# Altium PCB NSHID.PcbDoc
Units mil, origin at the board's own origin, x right, y up, seen from the top; angles counter-clockwise.
Board outline 3346.46 x 2204.72 mil, 2 copper layers (Top Layer, Bottom Layer); 51 components, 43 nets, 190 pads, 78 vias.
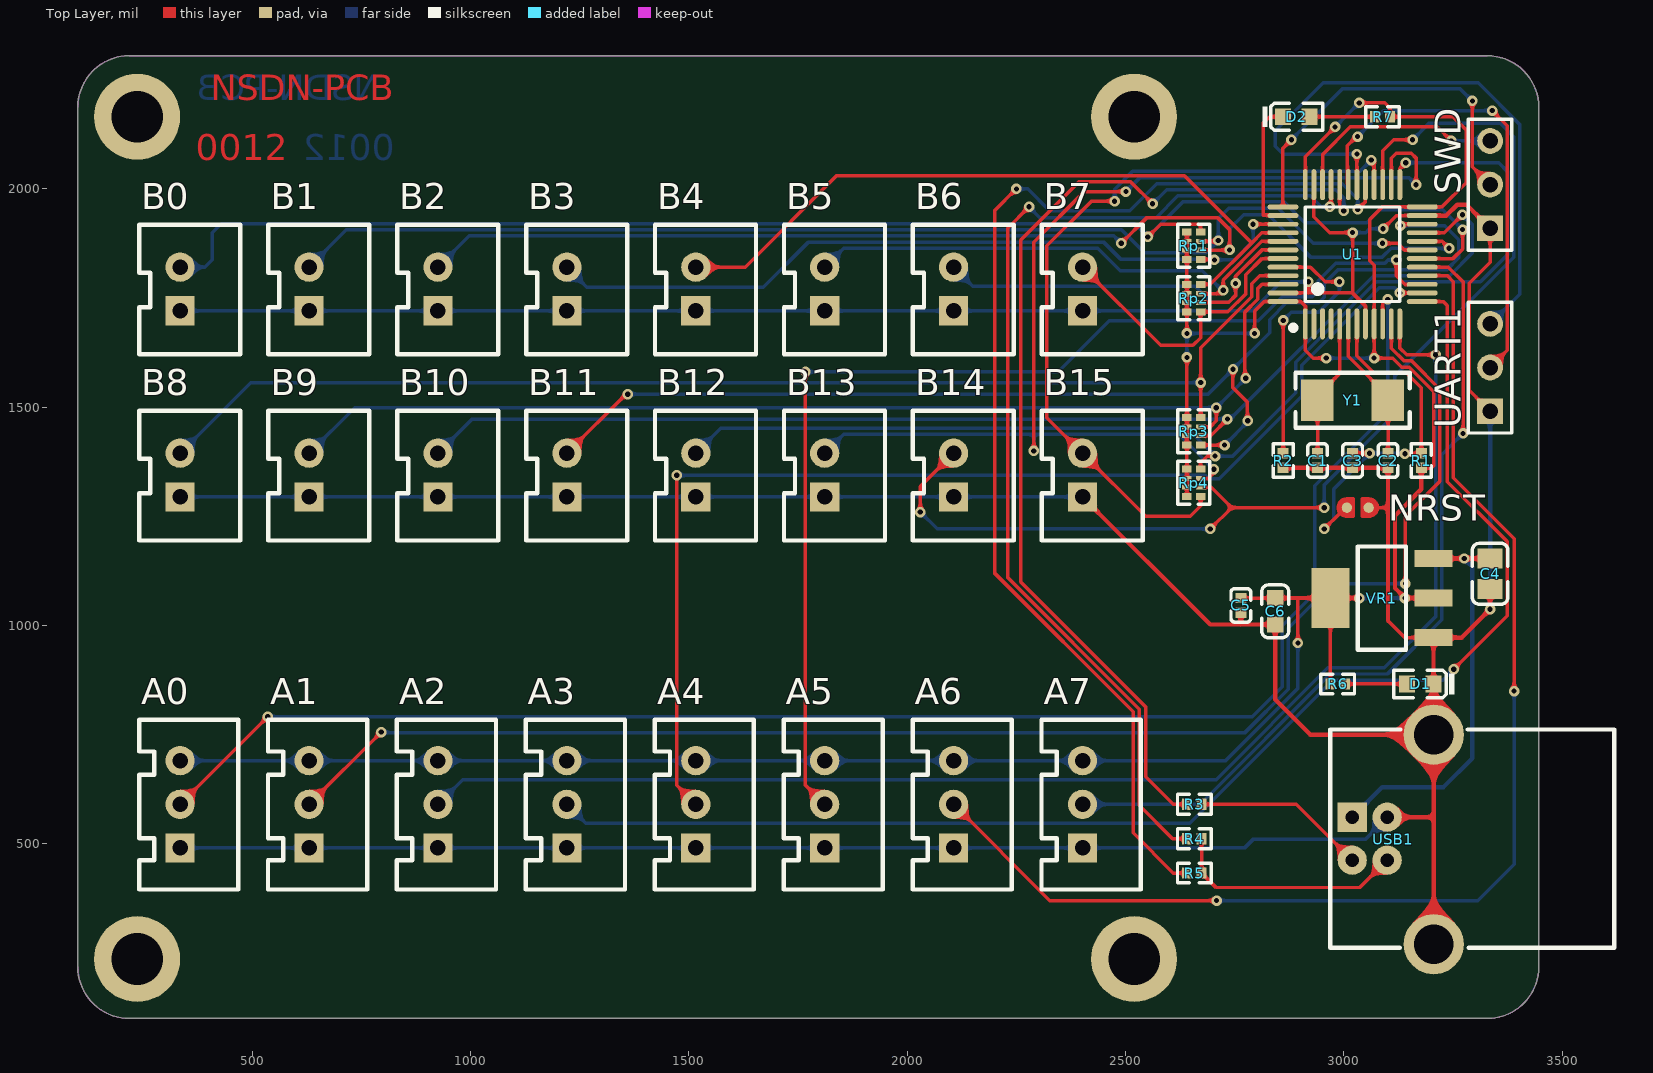
[diagram p0: Top Layer view]
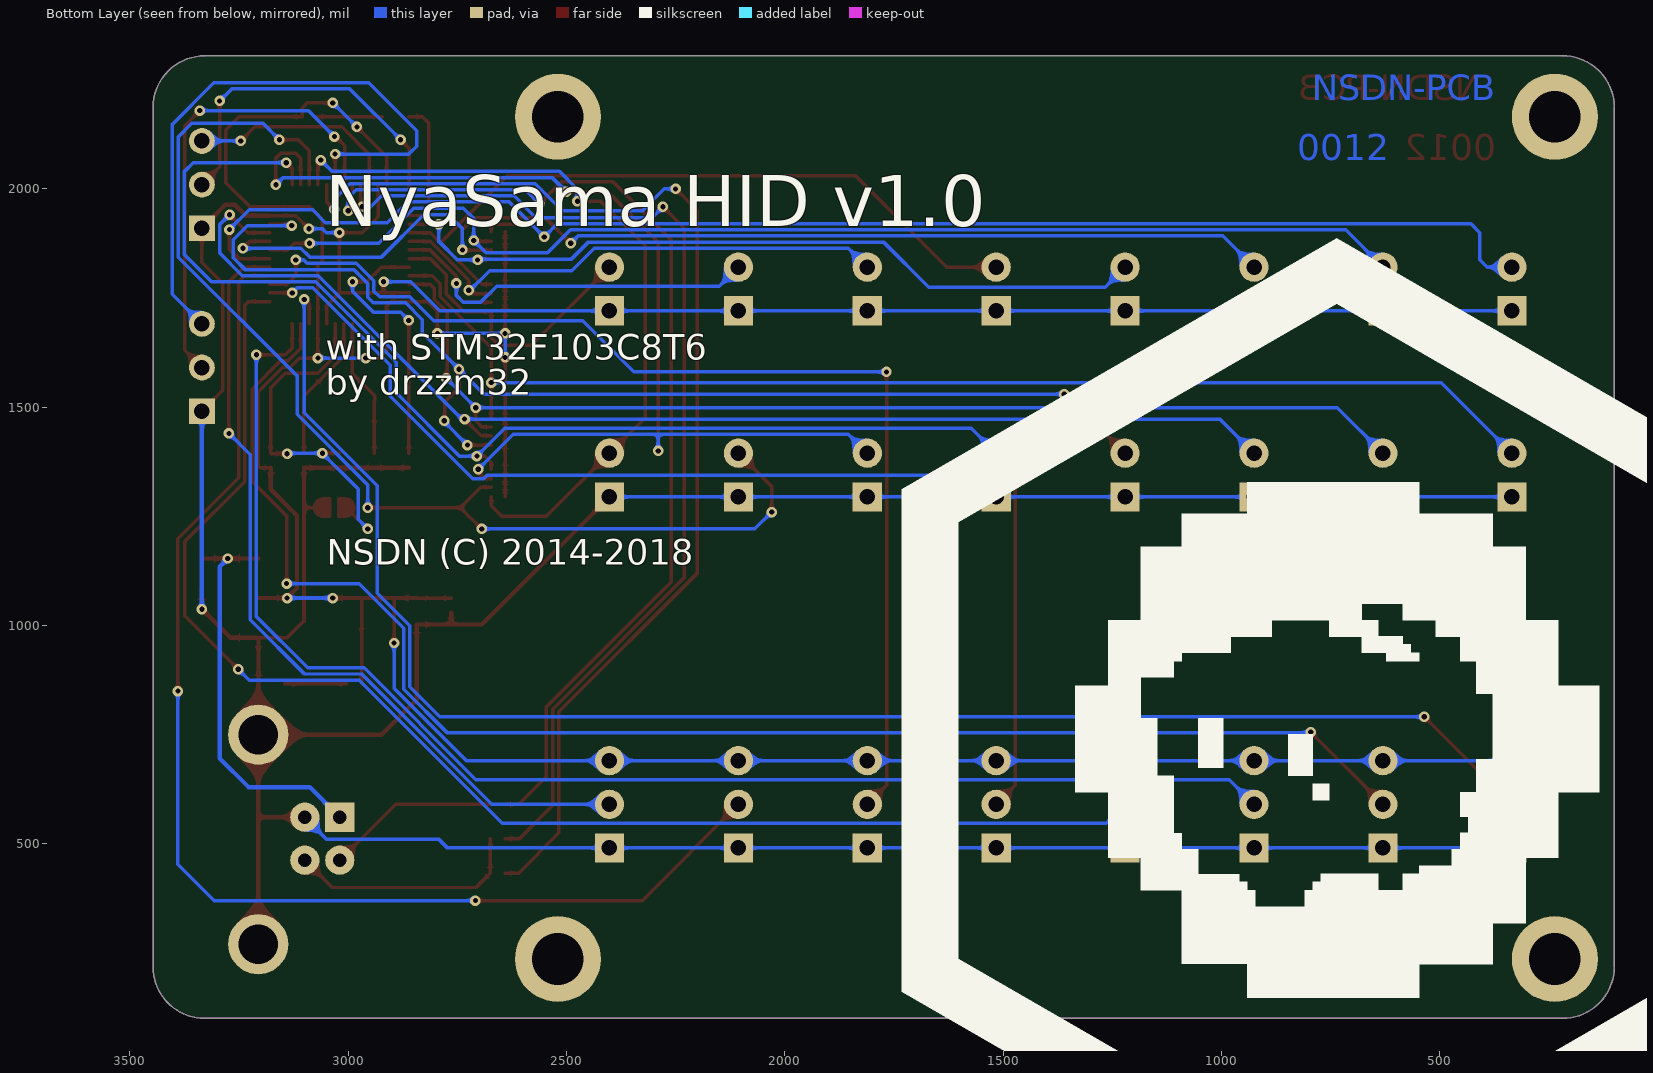
[diagram p1: Bottom Layer view, seen from below]
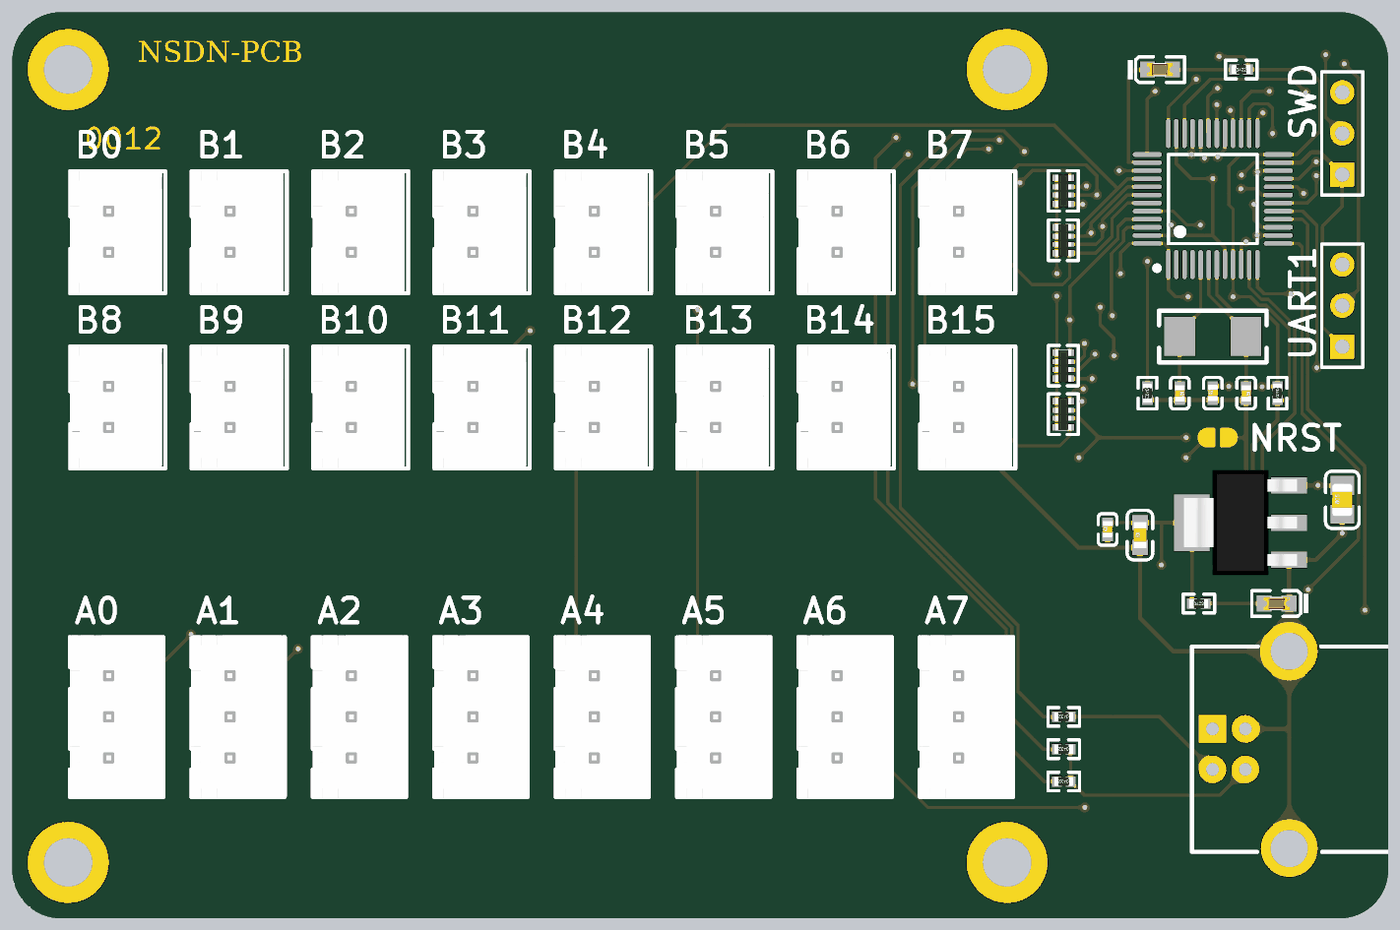
[diagram p2: 3D render of the assembled board from above, using the file's embedded part models]

## Layer stack, top to bottom
Top Solder: solder mask 0.4, Solder Resist, Dk 3.5
Top Layer: signal copper 1.4
Dielectric 1: dielectric 12.6, FR-4, Dk 4.8
Bottom Layer: signal copper 1.4
Bottom Solder: solder mask 0.4, Solder Resist, Dk 3.5

## Board outline
100.25,218.36 100.25,2186.86 cw(c218.36,2186.86) 218.36,2304.97 3328.6,2304.97 cw(c3328.6,2186.86) 3446.71,2186.86 3446.71,218.36 cw(c3328.6,218.36) 3328.6,100.25 218.36,100.25 cw(c218.36,218.36)

## Design rules (kind name [scope] priority, off if disabled: settings)
Clearance [All] p1: gap=6 ignorepadtopadclearanceinfootprint=FALSE
HoleSize [All] p1: absolutevalues=TRUE maxlimit=250 minlimit=11.81 maxpercent=80.000 minpercent=20.000
HoleToHoleClearance [All] p1: gap=18 allowstackedmicrovias=TRUE
MinimumSolderMaskSliver [All] p1: minsoldermaskwidth=6
PolygonConnect [All] p1: connectstyle=Relief reliefconductorwidth=10 reliefentries=4 polygonreliefangle="90 Angle" airgapwidth=10
RoutingTopology [All] p1: topology=Daisy_Balanced
RoutingVias [All] p1: holewidth=12 width=24 viastyle="Through Hole" minholewidth=11.81 minwidth=23.62 maxholewidth=250 maxwidth=261.81
SilkToSilkClearance [All] p1: silktosilkclearance=6
SilkToSolderMaskClearance [IsPad] p1: minsilkscreentomaskgap=6 clearancetoexposedcopper=TRUE
SolderMaskExpansion [All] p1: expansion=2
UnRoutedNet [All] p1: checkbadconnections=TRUE
Width [All] p1: maxlimit=20 minlimit=6 preferedwidth=8
23 further rules are at their usual default settings.

## Components (designator, comment, footprint, x,y, rotation, side; value= is the part's Value field where it differs from the comment)
A0 "HDR-1X3" XH2.54-LI-3P 334.65,590.55 r90 top (schematic designator JP17)
A1 "HDR-1X3" XH2.54-LI-3P 629.92,590.55 r90 top (schematic designator JP18)
A2 "HDR-1X3" XH2.54-LI-3P 925.2,590.55 r90 top (schematic designator JP19)
A3 "HDR-1X3" XH2.54-LI-3P 1220.47,590.55 r90 top (schematic designator JP20)
A4 "HDR-1X3" XH2.54-LI-3P 1515.75,590.55 r90 top (schematic designator JP21)
A5 "HDR-1X3" XH2.54-LI-3P 1811.02,590.55 r90 top (schematic designator JP22)
A6 "HDR-1X3" XH2.54-LI-3P 2106.3,590.55 r90 top (schematic designator JP23)
A7 "HDR-1X3" XH2.54-LI-3P 2401.57,590.55 r90 top (schematic designator JP24)
B0 "HDR-1X2" XH2.54-LI-2P 334.65,1770.87 r90 top (schematic designator JP1)
B1 "HDR-1X2" XH2.54-LI-2P 629.92,1770.87 r90 top (schematic designator JP2)
B2 "HDR-1X2" XH2.54-LI-2P 925.2,1770.87 r90 top (schematic designator JP3)
B3 "HDR-1X2" XH2.54-LI-2P 1220.47,1770.87 r90 top (schematic designator JP4)
B4 "HDR-1X2" XH2.54-LI-2P 1515.75,1770.87 r90 top (schematic designator JP5)
B5 "HDR-1X2" XH2.54-LI-2P 1811.02,1770.87 r90 top (schematic designator JP6)
B6 "HDR-1X2" XH2.54-LI-2P 2106.3,1770.87 r90 top (schematic designator JP7)
B7 "HDR-1X2" XH2.54-LI-2P 2401.57,1770.87 r90 top (schematic designator JP8)
B8 "HDR-1X2" XH2.54-LI-2P 334.65,1344.68 r90 top (schematic designator JP9)
B9 "HDR-1X2" XH2.54-LI-2P 629.92,1344.68 r90 top (schematic designator JP10)
B10 "HDR-1X2" XH2.54-LI-2P 925.2,1344.68 r90 top (schematic designator JP11)
B11 "HDR-1X2" XH2.54-LI-2P 1220.47,1344.68 r90 top (schematic designator JP12)
B12 "HDR-1X2" XH2.54-LI-2P 1515.75,1344.68 r90 top (schematic designator JP13)
B13 "HDR-1X2" XH2.54-LI-2P 1811.02,1344.68 r90 top (schematic designator JP14)
B14 "HDR-1X2" XH2.54-LI-2P 2106.3,1344.68 r90 top (schematic designator JP15)
B15 "HDR-1X2" XH2.54-LI-2P 2401.57,1344.68 r90 top (schematic designator JP16)
C1 "20pF (200) 5% 50V" 0402_C 2939.76,1377.95 r270 top
C2 "20pF (200) 5% 50V" 0402_C 3101.18,1377.95 r270 top
C3 "100nF (104) 10% 16V" 0402_C 3020.08,1377.95 r90 top
C4 "10uF (106) 10% 25V" 0805_C 3335.04,1118.5 r90 top
C5 "100nF (104) 10% 16V" 0402_C 2764.17,1046.26 r90 top
C6 "10uF (106) 10% 10V" 0603_C 2842.91,1032.68 r90 top
D1 "绿灯 0603" 0603_LED_S1 3175.2,866.14 r180 top
D2 "白灯 0603" 0603_LED_S1 2891.34,2165.35 r0 top
NRST "NRST" DEBUG_B 3032,1270 r0 top (schematic designator DE1)
NSDN "Comment" NSDN 736.28,-413.39 r180 bottom
R1 "100KΩ (1003) ±1%" 0402_R 3177.56,1377.95 r270 top
R2 "100KΩ (1003) ±1%" 0402_R 2861.02,1377.95 r270 top
R3 "22Ω (22R0) ±1%" 0402_R 2657.48,590.55 r180 top
R4 "22Ω (22R0) ±1%" 0402_R 2657.48,511.81 r180 top
R5 "1.5KΩ (1501) ±1%" 0402_R 2657.48,433.07 r180 top
R6 "1KΩ (1001) ±1%" 0402_R 2986.02,866.14 r0 top
R7 "1KΩ (1001) ±1%" 0402_R 3088.98,2165.35 r0 top
Rp1 "10KΩ (103) ±5%" 0402_Rx4 2656.5,1870.08 r270 top
Rp2 "10KΩ (103) ±5%" 0402_Rx4 2656.5,1750 r270 top
Rp3 "10KΩ (103) ±5%" 0402_Rx4 2656.5,1444.88 r270 top
Rp4 "10KΩ (103) ±5%" 0402_Rx4 2656.5,1326.77 r270 top
SWD "SWDIO" HDR1X3 3335.04,1909.84 r90 top (schematic designator P1)
U1 "STM32F103C8T6" LQFP-48_7x7x05P 3020.08,1850.39 r0 top
UART1 "USART1" HDR1X3 3335.04,1490.94 r90 top (schematic designator P2)
USB1 "USB" USB-B/S_A 3099.31,511.81 r90 top
VR1 "AMS1117-3.3" SOT-223 3087.4,1062.99 r0 top
Y1 "8MHz ±20ppm 20pF" SMD-5032_2P 3020.08,1515.75 r180 top

## Footprints (in the part's own frame and the unit in brackets; to place one, negate y for a bottom-side part, rotate by r counter-clockwise, add the part's x,y. Pads: shape width x height; smd on the part's side, far side on the other; paste and mask are expansions set on the pad)
0402_C [mm]
  rect 0.6x0.65 smd mask+0.051: 1(-0.425,0) 2(0.425,0)
  silkscreen extent -0.97,-0.58 0.98,0.58, body extent -0.48,-0.3 0.52,0.3, height 0.2
0402_R [mm]
  rect 0.6x0.65 smd mask+0.051: 1(-0.425,0) 2(0.425,0)
  silkscreen extent -0.97,-0.57 0.98,0.57, body extent -0.57,-0.27 0.58,0.28, height 0.41
0402_Rx4 [mm]
  rect 0.4x0.55 smd mask+0.051: 1(-0.8,-0.4) 4(0.8,-0.4) 5(0.8,0.4) 8(-0.8,0.4)
  rect 0.3x0.55 smd mask+0.051: 2(-0.25,-0.4) 3(0.25,-0.4) 6(0.25,0.4) 7(-0.25,0.4)
  silkscreen extent -1.25,-0.93 1.25,0.93, body extent -1,-0.5 1,0.5, height 0.45
0603_C [mm]
  rect 0.93x0.98 smd: 1(-0.77,0) 2(0.77,0)
  silkscreen extent -1.54,-0.79 1.54,0.79, body extent -0.8,-0.4 0.8,0.4, height 0.3
0603_LED_S1 [mm]
  rect 0.93x0.98 smd: A(0.77,0) K(-0.77,0)
  silkscreen extent -1.97,-0.79 1.53,0.79, body extent -0.8,-0.4 0.8,0.4, height 0.6
0805_C [mm]
  rect 1.16x1.47 smd: 1(-0.89,0) 2(0.89,0)
  silkscreen extent -1.77,-1.04 1.77,1.04, body extent -1,-0.62 1,0.63, height 0.77
DEBUG_B [mm] "调试断点焊盘"
  round 0.6 smd paste-0.6: 1(-0.635,0) 2(0.635,0)
  Top Layer region: 0.254,-0.508 0.762,-0.508 0.908,-0.479 1.031,-0.396 1.114,-0.273 1.143,-0.127 1.143,-0.127 1.143,0 1.104,0.194 0.994,0.359 0.829,0.469 0.635,0.508 0.635,0.508 0.254,0.508
  Top Layer region: -0.254,0.508 -0.762,0.508 -0.908,0.479 -1.031,0.396 -1.114,0.273 -1.143,0.127 -1.143,0.127 -1.143,0 -1.104,-0.194 -0.994,-0.359 -0.829,-0.469 -0.635,-0.508 -0.635,-0.508 -0.254,-0.508
  Top Layer lines w0.203: -1.033,-0.315 cw(c-0.635,0) -0.773,0.489 cw(c-0.635,0) -0.635,0.508 -0.254,0.508 -0.254,0 -0.254,-0.508 -0.635,-0.508 cw(c-0.635,0) -0.994,-0.359 cw(c-0.635,0) -1.033,-0.315 ; 0.254,-0.508 0.254,0 0.254,0.508 0.635,0.508 cw(c0.635,0) 1.143,0 cw(c0.635,0) 0.635,-0.508 0.254,-0.508
HDR1X3 [mm] "Connector; Header; 3 Position"
  rect 1.5x1.5 hole 0.9: 1(0,0)
  round 1.5 hole 0.9: 2(2.54,0) 3(5.08,0)
  silkscreen extent -1.27,-1.27 6.35,1.27
LQFP-48_7x7x05P [mm]
  oval 0.28x1.8 smd mask+0.051: 1(-2.75,-4.05) 2(-2.25,-4.05) 3(-1.75,-4.05) 4(-1.25,-4.05) 5(-0.75,-4.05) 6(-0.25,-4.05) 7(0.25,-4.05) 8(0.75,-4.05) 9(1.25,-4.05) 10(1.75,-4.05) 11(2.25,-4.05) 12(2.75,-4.05) 25(2.75,4.05) 26(2.25,4.05) 27(1.75,4.05) 28(1.25,4.05) 29(0.75,4.05) 30(0.25,4.05) 31(-0.25,4.05) 32(-0.75,4.05) 33(-1.25,4.05) 34(-1.75,4.05) 35(-2.25,4.05) 36(-2.75,4.05)
  oval 1.8x0.28 smd mask+0.051: 13(4.05,-2.75) 14(4.05,-2.25) 15(4.05,-1.75) 16(4.05,-1.25) 17(4.05,-0.75) 18(4.05,-0.25) 19(4.05,0.25) 20(4.05,0.75) 21(4.05,1.25) 22(4.05,1.75) 23(4.05,2.25) 24(4.05,2.75) 37(-4.05,2.75) 38(-4.05,2.25) 39(-4.05,1.75) 40(-4.05,1.25) 41(-4.05,0.75) 42(-4.05,0.25) 43(-4.05,-0.25) 44(-4.05,-0.75) 45(-4.05,-1.25) 46(-4.05,-1.75) 47(-4.05,-2.25) 48(-4.05,-2.75)
  silkscreen extent -3.6,-4.42 2.75,2.75
NSDN [mil]
  silkscreen extent -996,0 996,2300
SMD-5032_2P [mm]
  rect 1.9x2.4 smd: 1(-2.05,0) 2(2.05,0)
  silkscreen extent -3.32,-1.6 3.32,1.6
SOT-223 [mm]
  rect 2.2x1 smd: 1(3,-2.3) 2(3,0) 3(3,2.3)
  rect 2.2x3.5 smd: 2(-3,0)
  silkscreen extent -1.4,-3 1.4,3, body extent -3.49,-3.24 3.49,3.24, height 1.64
USB-B/S_A [mm] "b型USB 母座 16.3*13.7*11mm"
  rect 1.7x1.7 hole 0.8: 1(1.25,2.032)
  round 1.7 hole 0.8: 2(-1.25,2.032) 3(-1.25,0) 4(1.25,0)
  round 3.5 hole 2.3: 4(-6.141,-2.71) 4(6.051,-2.71)
  silkscreen extent -6.35,-13.21 6.35,3.3, body extent -6.86,-13.16 6.86,3.14, height 11.45
XH2.54-LI-2P [mm] "接插件，2P"
  rect 1.7x1.7 hole 0.9: 1(-1.27,0)
  round 1.7 hole 0.9: 2(1.27,0)
  silkscreen extent -3.81,-3.51 3.74,2.37, body extent -3.77,-3.3 3.77,2.4, height 7.05
XH2.54-LI-3P [mm] "接插件，3P"
  rect 1.7x1.7 hole 0.9: 1(-2.54,0)
  round 1.7 hole 0.9: 2(0,0) 3(2.54,0)
  silkscreen extent -4.95,-3.38 4.93,2.39, body extent -5.04,-3.3 5.04,2.4, height 7.03

## Part data
A0 A1 A2 A3 A4 A5 A6 A7: library part "Header 3", "3P接插件"
B0 B1 B2 B3 B4 B5 B6 B7 B8 B9 B10 B11 B12 B13 B14 B15: library part "Header 2", "2P接插件"
C1 C2: library part "0402 20pF (200) 5% 50V", "贴片电容", Package=0402, SuppliersPartNumber=C1554, ComponentLink1Description=供?, ComponentLink1URL=http://www.szlcsc.com/product/details_1906.html, Supplier=LC
C3 C5: library part "0402 100nF (104) 10% 16V", "贴片电容", Package=0402, SuppliersPartNumber=C1525, ComponentLink1Description=供?, ComponentLink1URL=http://www.szlcsc.com/product/details_1877.html, Supplier=LC
C4: library part "0805 10uF (106) 10% 25V", "贴片电容", Package=0805, SuppliersPartNumber=C15850, ComponentLink1Description=供?, ComponentLink1URL=http://www.szlcsc.com/product/details_16532.html, Supplier=LC
C6: library part "0603 10uF (106) 10% 10V", "贴片电容", Package=0603, SuppliersPartNumber=C19702, ComponentLink1Description=供?, ComponentLink1URL=http://www.szlcsc.com/product/details_20411.html, Supplier=LC
D1: library part "0603 绿灯", "发光二极管", Package=0603, SuppliersPartNumber=C72043, ComponentLink1Description=供?, ComponentLink1URL=http://www.szlcsc.com/product/details_73152.html, Supplier=LC
D2: library part "0603 白灯", "发光二极管", Package=0603, SuppliersPartNumber=C2290, ComponentLink1Description=供?, ComponentLink1URL=http://www.szlcsc.com/product/details_2663.html, Supplier=LC
NRST: library part DEBUG, "调试断点焊盘"
R1 R2: library part "0402 100KΩ (1003) 1%", "贴片电阻", Package=0402, SuppliersPartNumber=C25741, ComponentLink1Description=供?, ComponentLink1URL=http://www.szlcsc.com/product/details_26484.html, Supplier=LC
R3 R4: library part "0402 22Ω (22R0) 1%", "贴片电阻", Package=0402, SuppliersPartNumber=C25092, ComponentLink1Description=供?, ComponentLink1URL=http://www.szlcsc.com/product/details_25835.html, Supplier=LC
R5: library part "0402 1.5KΩ (1501) 1%", "贴片电阻", Package=0402, SuppliersPartNumber=C25867, ComponentLink1Description=供?, ComponentLink1URL=http://www.szlcsc.com/product/details_26610.html, Supplier=LC
R6 R7: library part "0402 1KΩ (1001) 1%", "贴片电阻", Package=0402, SuppliersPartNumber=C11702, ComponentLink1Description=供?, ComponentLink1URL=http://www.szlcsc.com/product/details_12256.html, Supplier=LC
Rp1 Rp2 Rp3 Rp4: library part "0402*4 10KΩ (103) 5%", "贴片排阻", Package=0402*4, SuppliersPartNumber=C25725, ComponentLink1Description=供?, ComponentLink1URL=http://www.szlcsc.com/product/details_26468.html, Supplier=LC
SWD UART1: library part "Header 3", "Header, 3-Pin", LatestRevisionDate=17-Jul-2002, LatestRevisionNote="Re-released for DXP Platform.", Publisher="Altium Limited"
U1: "ARM", Package=LQFP-48_7x7x05P, SuppliersPartNumber=C8734, ComponentLink1Description=供?, ComponentLink1URL=http://www.szlcsc.com/product/details_9243.html, Supplier=LC
USB1: library part USB-B/S, "USB-B型母接口", BOM名称=USB
VR1: library part "SOT-223 AMS1117-3.3", "低压差线性稳压(LDO)", Package=SOT-223, SuppliersPartNumber=C6186, ComponentLink1Description=供?, ComponentLink1URL=http://www.szlcsc.com/product/details_6652.html, Supplier=LC
Y1: library part "SMD-5032_2P 8MHz 20ppm 20pF", "贴片晶振", Package=SMD-5032_2P, SuppliersPartNumber=C115962, ComponentLink1Description=供?, ComponentLink1URL=http://www.szlcsc.com/product/details_117214.html, Supplier=LC

## Free pads (board coordinates)
  round 196.85 hole 118.11: ""(236.22,236.22) ""(236.22,2165.35) ""(2519.69,236.22) ""(2519.69,2165.35)

## Via types
v1: diameter 24, hole 12, Top Layer to Bottom Layer, tented both sides, 78 vias

## Nets (pads, with @x,y where several pads share a name; then routed paths per layer and width w, separated by ;. In a path a pad name is that pad's centre, name@x,y a point inside that pad or via, vN(x,y) a via of type N, cw(c..) or ccw(c..) an arc to the next point about the centre after c; other vN are vias at no path point)
3V3: A0.3 A1.3 A2.3 A3.3 A4.3 A5.3 A6.3 A7.3 C5.2 C6.2 R1.2 R6.1 R7.2 Rp1.1 Rp1.2 Rp1.3 Rp1.4 Rp2.1 Rp2.2 Rp2.3 Rp2.4 Rp3.1 Rp3.2 Rp3.3 Rp3.4 Rp4.1 Rp4.2 Rp4.3 Rp4.4 U1.1 U1.9 U1.24 U1.36 U1.48 VR1.2 | length 6603.6
  Top Layer w8: Rp4.4 Rp4.3 Rp4.2 Rp4.1 Rp3.4 Rp3.3 Rp3.2 Rp3.1 v1(2640.75,1614.17) ; v1(2640.75,1669) Rp2.4 Rp2.3 Rp2.2 Rp2.1 Rp1.4 Rp1.3 Rp1.2 Rp1.1 ; C5.2 C6.2 ; v1(2795.57,1669) 2795.57,1720.31 2817.38,1742.13 U1.48 2901.58,1742.13 2911.81,1731.89 U1.1 2911.81,1630.69 2930,1612.5 2930.1,1612.6 v1(2959.89,1612.6) ; v1(2895,960) 2895,1062.99 ; U1.36@2911.81,2009 U1.36 2911.81,2073.81 v1(2980,2142) ; R6.1 VR1.2@2969.29,1062.99 ; v1(3035.43,2197) 3093.79,2197 3105.71,2185.08 R7.2 3250,2165.35 3280.5,2134.85 3280.5,2014.5 3224.66,1958.66 U1.24 3087.72,1958.66 3059.05,1929.99 3059.05,1835.88 3069.29,1825.64 U1.9 v1(3069.29,1612.6) 3069.19,1612.5 3111.87,1612.5 3132.37,1592 3149.63,1592 3206,1535.63 3206,1366.32 3200.9,1361.22 R1.2
  Top Layer w10: C6.2 2895,1062.99 2969.29,1062.99 v1(3035.43,1062.99) ; R1.2 3177.56,1312.06 3117.18,1251.68 3117.18,1085.81 v1(3140,1062.99) VR1.2@3205.51,1062.99
  Bottom Layer w8: A0.3 A1.3 A2.3 A3.3 A4.3 A5.3 A6.3 A7.3 2729.04,690.55 2895,856.51 v1(2895,960) ; v1(2640.75,1614.17) v1(2640.75,1669) v1(2795.57,1669) ; v1(2959.89,1612.6) v1(3069.29,1612.6) ; v1(2980,2142) 3035,2197 v1(3035.43,2197)
  Bottom Layer w10: v1(3035.43,1062.99) v1(3140,1062.99)
A0: A0.2 U1.10 | length 3685.6
  Top Layer w8: A0.2 v1(535.09,791) ; U1.10 3088.98,1738.5 3097.26,1746.79 v1(3100.79,1746.79)
  Bottom Layer w8: v1(535.09,791) 2789.89,791 2859,860.11 2859,999.91 2933,1073.91 2933,1319.8 3100.79,1487.59 v1(3100.79,1746.79)
A1: A1.2 U1.11 | length 3486.6
  Top Layer w8: A1.2 v1(795.28,755.91) ; U1.11 3108.66,1635.51 3138.17,1606 3155.43,1606 3220,1541.43 3220,1330 3141,1251 v1(3141,1096)
  Bottom Layer w8: v1@795.28,755 2773.69,755 2873,854.31 2873,994.11 2974.89,1096 v1(3141,1096)
A2: A2.2 U1.12 | length 3206.1
  Top Layer w8: U1.12 3128.35,1635.63 3143.97,1620 v1(3210,1620)
  Bottom Layer w8: A2.2 981.64,647 2707.4,647 2963.4,903 3093,903 3210,1020 v1(3210,1620)
A3: A3.2 U1.13 | length 3197.3
  Top Layer w8: U1.13 3227.87,1742.13 3237,1733 3237,1329.4 3374,1192.4 3374,1022 v1(3252,900)
  Bottom Layer w8: A3.2 1264.02,547 2647,547 2975,875 3227,875 v1(3252,900)
A4: A4.2 U1.14 | length 2710
  Top Layer w8: v1(1472,1344) 1472,634.3 A4.2 ; v1(3128.19,1761.81) U1.14
  Bottom Layer w8: v1(1472,1344) 2682,1344 2690,1336 2714.98,1336 2903.78,1524.8 2903.78,1595.78 3081.4,1773.4 3116.6,1773.4 v1(3128.19,1761.81)
A5: A5.2 U1.15 | length 2585.7
  Top Layer w8: v1(1767,1581) 1767,634.58 A5.2 ; 3119.97,1801.15 3139.62,1781.5 U1.15 ; 3120,1801.18 v1(3120,1837.5)
  Bottom Layer w8: v1(1767,1581) 2345.5,1581 2462.5,1698 2804,1698 2859,1753 2928,1753 2941,1766 2941,1789.31 2981.69,1830 3094.19,1830 3101.69,1837.5 v1(3120,1837.5)
A6: A6.2 U1.16 | length 2878.7
  Top Layer w8: A6.2 2326.77,370.08 v1(2708.66,370.08) ; U1.16 3237.5,1801.18 3251,1787.68 3251,1338.18 3390,1199.18 v1(3390,850)
  Bottom Layer w8: v1(2708.66,370.08) 3307.09,370.08 3390,452.99 v1(3390,850)
A7: A7.2 U1.17 | length 1899.2
  Top Layer w8: U1.17 3239.13,1820.87 3273,1787 v1(3273,1440)
  Bottom Layer w8: A7.2 2670.75,590.55 2969.2,889 3100,889 3224,1013 3224,1391 v1(3273,1440)
D0: B0.2 Rp1.8 U1.18 | length 3405.1
  Top Layer w8: v1(2551.1,1890) 2580.55,1919.45 2654.37,1919.45 2666.39,1919.45 2672.24,1913.59 Rp1.8 ; U1.18 3250.05,1840.55 3272,1862.5 v1(3272,1907)
  Bottom Layer w8: B0.2 391.37,1820.87 408,1837.5 408,1900 428.33,1920.33 2520.77,1920.33 v1(2551.1,1890) 2631.2,1970.1 2863.55,1970.1 2910.83,1922.82 3052.11,1922.82 3081.29,1952 3227,1952 v1(3272,1907)
D1: B1.2 Rp1.7 U1.19 | length 2759.8
  Top Layer w8: Rp1.7 2710.63,1879.92 v1(2712.59,1881.89) ; v1(3088.39,1875.49) 3123.5,1875.49 3138.75,1860.24 U1.19
  Bottom Layer w8: B1.2 715.39,1906.33 2490.69,1906.33 2543.52,1853.5 2684.21,1853.5 v1(2712.59,1881.89) 2712.59,1932.28 2736.41,1956.1 2849.55,1956.1 2930.16,1875.49 v1(3088.39,1875.49)
D2: B2.2 Rp1.6 U1.20 | length 2679.4
  Top Layer w8: v1(2490,1875.49) 2547.96,1933.45 2711.74,1933.45 2738.19,1907 v1(2738.19,1860.24) 2737.84,1859.89 Rp1.6@2672.59,1859.89 ; Rp1.6 Rp1.6@2672.59,1859.89 ; Rp1.6@2672.98,1859.5 Rp1.6@2672.59,1859.89 ; U1.20 3225,1879.92 v1(3241,1863.92)
  Bottom Layer w8: B2.2 996.66,1892.33 2473.15,1892.33 v1(2490,1875.49) ; v1(2738.19,1860.24) 2738.19,1908.48 2771,1941.29 2826.5,1941.29 2923.79,1844 3088.39,1844 3108.31,1863.92 v1(3241,1863.92)
D3: B3.2 Rp1.5 U1.39 | length 1806.2
  Top Layer w8: Rp1.5 v1@2702.42,1838.58 ; v1@2701.5,1839.5 v1@2702.42,1838.58 ; v1(2703.5,1837.5) v1@2702.42,1838.58 ; v1(2792,1919.29) U1.39
  Bottom Layer w8: B3.2 1266.34,1775 1670.67,1775 1774,1878.33 2449.67,1878.33 2488.5,1839.5 v1@2701.5,1839.5 ; v1(2703.5,1837.5) 2749.97,1837.5 2792,1879.53 v1(2792,1919.29)
D4: B4.2 Rp2.8 U1.40 | length 1661.4
  Top Layer w8: B4.2 1628.87,1820.87 1838,2030 2634.99,2030 2787.69,1877.3 2790,1877.3 ; Rp2.8 2694.2,1781.5 2790,1877.3 ; U1.40 2812.31,1899.61 2790,1877.3
D5: B5.2 Rp2.7 U1.41 | length 1226.3
  Top Layer w8: Rp2.7 2715.94,1759.84 v1(2723.81,1767.72) 2723.81,1791.31 2812.42,1879.92 U1.41
  Bottom Layer w8: B5.2 1854.49,1864.33 2436.67,1864.33 2488,1813 2676.03,1813 2723.81,1765.21 v1(2723.81,1767.72)
D6: B6.2 Rp2.6 U1.42 | length 976.9
  Top Layer w8: Rp2.6 2736.22,1740.16 2751.97,1755.91 v1(2751.97,1783.46) 2751.97,1799.67 2812.54,1860.24 U1.42
  Bottom Layer w8: B6.2 2150.17,1777 2660,1777 2696.84,1740.16 2736.22,1740.16 2751.97,1755.91 v1(2751.97,1783.46)
D7: B7.2 Rp2.5 U1.43 | length 676
  Top Layer w8: B7.2 2580.71,1641.73 2654.52,1641.73 2672,1659.21 2672,1718.5 Rp2.5 2734.37,1718.5 2775.14,1759.28 2775.14,1803.04 2812.65,1840.55 U1.43
D8: B8.2 Rp3.8 U1.45 | length 2838.8
  Top Layer w8: Rp3.8 v1(2672.24,1556.48) 2672.24,1636.58 2789.14,1753.48 2789.14,1783.24 2807.09,1801.18 U1.45
  Bottom Layer w8: B8.2 496.44,1556.48 v1(2672.24,1556.48)
D9: B9.2 Rp3.7 U1.46 | length 2568.5
  Top Layer w8: Rp3.7 2693.75,1454.72 2708,1468.98 v1(2708,1499) ; v1(2775.59,1566.59) 2773.57,1568.61 2773.57,1718.11 2803.14,1747.68 2803.14,1772.05 2812.59,1781.5 U1.46
  Bottom Layer w8: B9.2 734.24,1499 v1(2708,1499) v1(2775.59,1566.59)
D10: B10.2 Rp3.6 U1.21 | length 2841.9
  Top Layer w8: Rp3.6 2695.54,1435.04 v1(2733.5,1473) ; U1.21 3230.31,1899.61 v1(3271.65,1940.94)
  Bottom Layer w8: B10.2 1003.51,1473 v1(2733.5,1473) 2740.24,1473 3068.64,1801.4 3242.2,1801.4 3294,1853.2 3294,1918.59 v1(3271.65,1940.94)
D11: B11.2 Rp3.5 U1.22 | length 2765
  Top Layer w8: B11.2 1355.79,1530 v1(1360,1530) ; Rp3.5 v1(2726.89,1413.39) ; v1(2746.14,1587.14) 2746.14,1544.86 2779,1512 v1@2779,1473 ; v1(3129,1916) 3132.29,1919.29 U1.22
  Bottom Layer w8: v1(1360,1530) 2689,1530 v1(2746.14,1587.14) 2830,1671 2830,1700.51 2868.49,1739 2942.5,1739 2955,1751.5 2955,1783.51 2986.89,1815.4 3236.4,1815.4 3263,1842 3263,1884 3231,1916 v1(3129,1916) ; v1(2726.89,1413.39) 2780,1466.5 v1(2780,1468.98)
D12: B12.2 Rp4.8 U1.25 | length 2683.5
  Top Layer w8: Rp4.8 2672,1358.51 2672,1372.64 2687.5,1388.14 v1(2705.14,1388.14) ; U1.25 3128.35,2046.61 v1(3141.73,2060)
  Bottom Layer w8: B12.2 1573.21,1452.15 2641.14,1452.15 v1(2705.14,1388.14) 2745.1,1388.14 2889.78,1532.82 2889.78,1602.75 3074.44,1787.4 3312.95,1787.4 3375,1849.45 3375,2040 3355,2060 v1(3141.73,2060)
D13: B13.2 Rp4.7 U1.26 | length 2632.8
  Top Layer w8: v1(2290,1400) 2290,1878 2406,1994 v1(2501,1994) ; Rp4.7 2688.61,1336.61 2702,1350 v1(2702,1358) ; U1.26 3108.66,2070.4 3120.26,2082 3154.22,2082 3165.35,2070.87 v1(3165.35,2009.84)
  Bottom Layer w8: B13.2 1854.49,1438.15 2290,1438.15 ; v1(2290,1400) 2290,1438.15 ; v1(2501,1994) 2533.1,2026.1 3149.09,2026.1 v1(3165.35,2009.84) ; v1(2702,1358) 2621.85,1438.15 2290,1438.15
D14: B14.2 Rp4.6 U1.27 | length 2662.8
  Top Layer w8: v1(2030,1260) 2030,1318.38 B14.2 ; Rp4.6 2696,1316.93 2742.93,1270 ; v1(2694.2,1221.27) 2742.93,1270 ; v1(2955,1270) 2742.93,1270 ; U1.27 3088.98,2087.5 3113.98,2112.5 v1(3157.5,2112.5)
  Bottom Layer w8: v1(2030,1260) 2068.73,1221.27 v1(2694.2,1221.27) ; v1(2955,1270) 2955,1322 3117,1484 3117,1571.65 3389,1843.65 3389,2119 3358,2150 3195,2150 v1(3157.5,2112.5)
D15: B15.2 Rp4.5 U1.28 | length 1769.8
  Top Layer w8: v1(2475,1972) 2422,1972 2320,1870 2320,1476.26 B15.2 2546.26,1250 2648,1250 2672,1274 2672,1295.28 Rp4.5 ; v1(3063,2066) 3069.29,2059.71 U1.28
  Bottom Layer w8: v1(2475,1972) 2475,1999.11 2515.99,2040.1 3037.1,2040.1 v1(3063,2066)
GND: A0.1 A1.1 A2.1 A3.1 A4.1 A5.1 A6.1 A7.1 B0.1 B1.1 B2.1 B3.1 B4.1 B5.1 B6.1 B7.1 B8.1 B9.1 B10.1 B11.1 B12.1 B13.1 B14.1 B15.1 C1.2 C2.2 C3.1 C4.1 C5.1 C6.1 D1.K NRST.2 R2.2 SWD.1 U1.8 U1.23 U1.35 U1.47 UART1.1 USB1.4 VR1.1 | length 12273.7
  Top Layer w8: U1.47 2919,1761.81 ; v1(2919,1787.4) 2919,1761.81 ; U1.35 2931.5,1936.11 2967.61,1900 v1(3020,1900) 3020,1763.91 3018.79,1762.7 3049.61,1731.89 U1.8 ; 3018.79,1761.81 2919,1761.81 ; NRST.2 3077,1270 3101.18,1270 ; v1(3090,1908.82) 3120.16,1938.98 U1.23 ; USB1.4@3090.55,561.02 USB1.4@3099.31,561.02 ; 3100.59,1294.68 3101.18,1295.28 ; 3101.18,1011.26 3140,972.44 VR1.1 ; UART1.1 3287,1538.98 3287,1784.4 3335.04,1832.44 SWD.1
  Top Layer w10: B15.1 2693.9,1002.36 2764.17,1002.36 ; C5.1 2764.17,1002.36 ; R2.2 C1.2 C3.1 C2.2 3101.18,1295.28 3101.18,1270 3101.18,1011.26 ; USB1.4@3099.31,561.02 3206,561.02 ; U1.23 3234.69,1938.98 3259.66,1963.94 3281.17,1963.94 3294.65,1950.47 3294.65,1950.23 SWD.1 ; USB1.4@3197.24,270.02 3206,278.78 3206,561.02 ; C4.1 v1(3335.04,1037.48) 3270,972.44 VR1.1 D1.K 3206,865.65 USB1.4@3206,750.02 ; 2764.17,1002.36 C6.1 2842.91,830.47 2923.36,750.02 USB1.4@3206,750.02 ; 3206,561.02 USB1.4@3206,750.02
  Bottom Layer w8: A0.1 A1.1 A2.1 A3.1 A4.1 A5.1 A6.1 A7.1 2772.55,490.55 2793,511 3050.36,511 3099.31,559.95 USB1.4@3099.31,561.02 ; B8.1 B9.1 B10.1 B11.1 B12.1 B13.1 B14.1 B15.1 ; B0.1 B1.1 B2.1 B3.1 B4.1 B5.1 B6.1 B7.1 2789.87,1720.87 2856.4,1787.4 v1(2919,1787.4) ; v1@3018.79,1902.54 3021.34,1900 3050,1900 3058.82,1908.82 v1(3090,1908.82) ; USB1.4@3090.55,559.95 USB1.4@3090.55,561.02
  Bottom Layer w10: v1(3335.04,1037.48) UART1.1
NetC1_1: C1.1 U1.5 Y1.2 | length 317.6
  Top Layer w8: C1.1 2939.76,1515.35 Y1.2 2939.37,1525.96 2990.55,1577.14 U1.5
NetC2_1: C2.1 U1.6 Y1.1 | length 333.9
  Top Layer w8: U1.6 3010.24,1616.55 3100.79,1526 Y1.1 3101.18,1515.35 C2.1
NetC3_2: C3.2 NRST.1 R1.1 U1.7 | length 860.6
  Top Layer w8: v1(2955,1221.27) 2991.32,1257.59 3003.73,1270 NRST.1 ; 2992.86,1280.54 3001.56,1289.25 ; C3.2 v1(3059.06,1394.68) ; U1.7 3029.92,1618.01 3069.93,1578 3143.83,1578 3177.56,1544.27 R1.1 3176.58,1393.7 v1(3140,1393.7)
  Bottom Layer w8: v1(2955,1221.27) 2977,1243.27 2977,1312.63 v1(3059.06,1394.68) 3140,1394.68 v1(3140,1393.7)
NetD1_A: D1.A R6.2 | length 142.1
  Top Layer w8: R6.2 D1.A
NetD2_A: D2.A R7.1 | length 150.6
  Top Layer w8: D2.A R7.1
NetR2_1: R2.1 U1.44 | length 625.7
  Top Layer w8: U1.44 2923.63,1820.87 2957.1,1787.4 v1(2990,1787.4) ; R2.1 v1(2861.02,1698.76)
  Bottom Layer w8: v1(2861.02,1698.76) 2880.01,1717.75 2942.07,1717.75 2990,1765.67 v1(2990,1787.4)
NetR3_1: R3.1 USB1.2 | length 394.5
  Top Layer w8: R3.1 2891.35,590.55 3010.55,471.35 USB1.2@3010.55,462.6
NetR4_1: R4.1 R5.1 USB1.3 | length 539.8
  Top Layer w8: R4.1 R5.1 2707.28,400 3036.71,400 3090.55,453.84 USB1.3@3090.55,462.6
SWD_CLK: SWD.2 U1.37 | length 844.9
  Top Layer w8: U1.37 2860.63,2093.13 v1(2880,2112.5) ; v1(3294.5,2201.5) 3294.5,2050.38 SWD.2
  Bottom Layer w8: v1(2880,2112.5) 2879.76,2112.5 2996.26,2229 3267,2229 v1(3294.5,2201.5)
SWD_DIO: SWD.3 U1.34 | length 492
  Top Layer w8: U1.34 2951.18,2078.27 3014.91,2142 3213.84,2142 v1(3246,2109.84)
  Bottom Layer w8: v1(3246,2109.84) SWD.3
SYS_LED: D2.K U1.38 | length 308
  Top Layer w8: U1.38 2815,1939.98 2815,2150 2830.35,2165.35 D2.K
U5V: C4.2 USB1.1 VR1.3 | length 934.7
  Top Layer w10: VR1.3 v1(3275.59,1153.54) C4.2
  Bottom Layer w10: USB1.1@3010.55,561.02 USB1.1 3088.21,629.92 3228.35,629.92 3294.5,696.07 3294.5,1134.63 v1(3275.59,1153.54)
USART1_RX: U1.31 UART1.2 | length 1074.7
  Top Layer w8: U1.31 3008,2012.08 3008,2099.11 3028.89,2120 v1(3031.5,2120) ; UART1.2 3335.04,1591.16 3374.57,1630.69 3374.57,2144.93 v1(3340,2179.5)
  Bottom Layer w8: v1(3031.5,2120) 3091,2179.5 v1(3340,2179.5)
USART1_TX: U1.30 UART1.3 | length 1429.6
  Top Layer w8: U1.30 3029.92,2079.92 v1(3030,2080)
  Bottom Layer w8: v1(3030,2080) 2861.02,2080 2842.91,2098.11 2842.91,2132.91 2953,2243 3307.61,2243 3403,2147.61 3403,1758.9 UART1.3
USB_DM: R3.2 U1.32 | length 2401.2
  Top Layer w8: v1(2562,1966) 2512,2016 2393,2016 2260,1883 2260,1099.8 2546.26,813.54 2546.26,653.26 2608.97,590.55 R3.2 ; U1.32 2990.55,1959.45 v1(3000,1950) v1@2997.94,1950
  Bottom Layer w8: v1(2562,1966) 2594.1,1998.1 2981.9,1998.1 3000,1980 v1(3000,1950)
USB_DP: R4.2 U1.33 | length 2439.2
  Top Layer w8: v1(2279,1959) 2230,1910 2230,1110 2531.38,808.62 2531.38,588.14 2607.71,511.81 R4.2 ; v1(2968,1959) 2970.87,1961.87 U1.33
  Bottom Layer w8: v1(2279,1959) 2303.67,1934.33 2569.99,1934.33 2619.76,1984.1 2922.85,1984.1 2947.95,1959 v1(2968,1959)
USB_PU: R5.2 U1.29 | length 2719.1
  Top Layer w8: v1(2250,2000) 2200,1950 2200,1120.2 2517.38,802.82 2517.38,525.21 2609.52,433.07 R5.2 ; v1(3032,1953) 3049.61,1970.61 U1.29
  Bottom Layer w8: v1(2250,2000) 2276,2000 2326,1950 2509.42,1950 2571.52,2012.1 2996.01,2012.1 3032,1976.11 v1(3032,1953)
pads on no net: U1.2 U1.3 U1.4

## Keep-outs
Keep-Out Layer:
  the board outline again, w1

## Other copper
Top Layer:
  text "NSDN-PCB" at 404.98,2184.11 h100
  text "0012" at 370.7,2066 h60
Bottom Layer:
  text "NSDN-PCB" at 792.16,2184.11 h100
  text "0012" at 826.77,2066 h60

## Silkscreen, mask and mechanical layers (free items; w line width, h text height)
Bottom Overlay:
  text "NyaSama HID v1.0" at 3052,1875.49 h200
  text "with STM32F103C8T6" at 3051.25,1589.75 h100
  text "by drzzm32" at 3051.25,1508.84 h100
  text "NSDN (C) 2014-2018" at 3049.61,1120.2 h100
Top Solder:
  text "NSDN-PCB" at 404.98,2183.97 h100
  text "0012" at 370.7,2066 h60
Bottom Solder:
  text "NSDN-PCB" at 792.16,2184.11 h100
  text "0012" at 826.77,2066 h60